# EAGLE board VT_adapter (EAGLE 8.1.1)
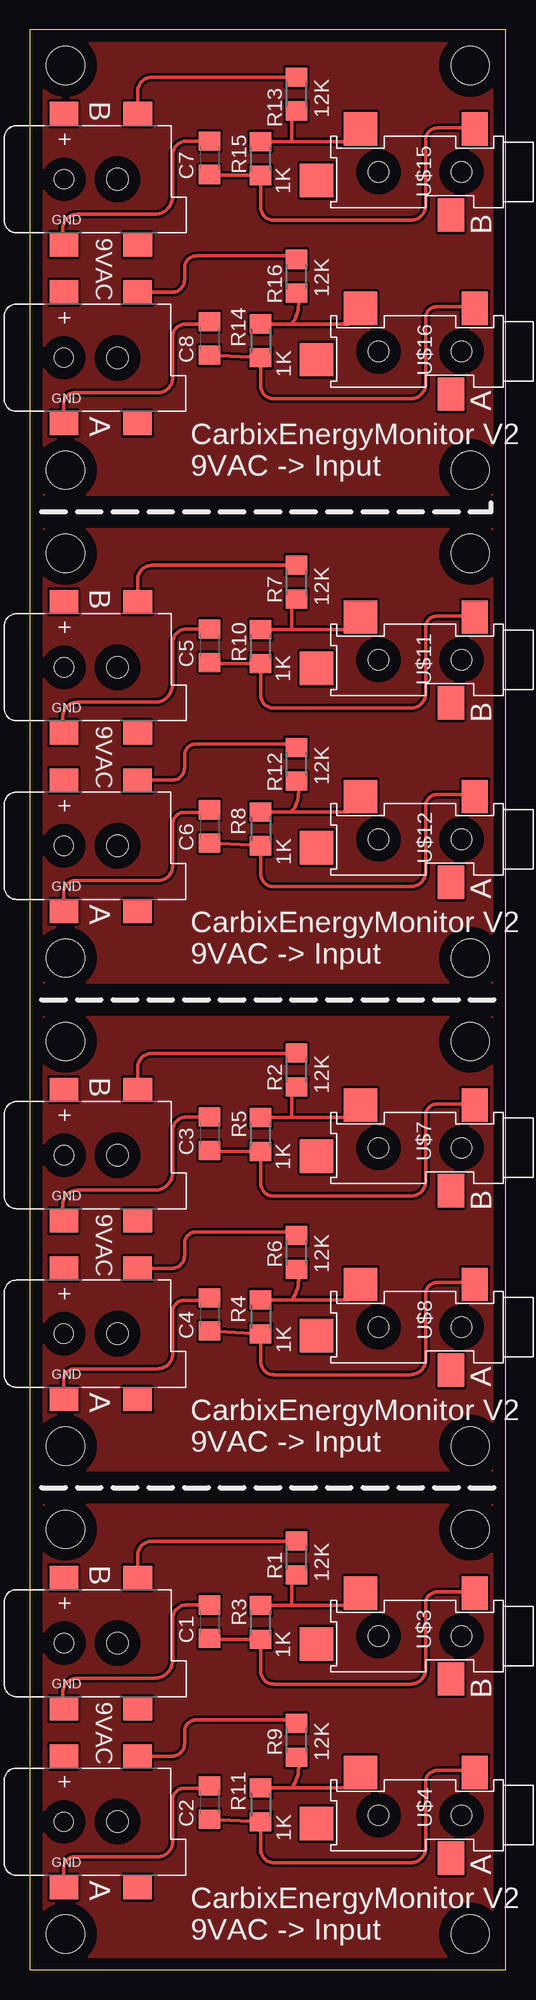
[diagram p0: board, top side]

Size 40 x 163 mm. Coordinates in mm from the lower left corner, seen from the top.
Outline: 0,0 40,0 40,163 0,163 0,0
Copper layers (1*16): Top 0.035mm / dielectric 1.5mm / Bottom 0.035mm
Design rules "default *": minimum track width 10mil, minimum drill 20mil, track to track 8mil, track to pad 8mil, pad to pad 8mil, via to via 8mil, smd to smd 8mil, copper to edge 40mil, drill to drill 8mil, minimum pad ring 10mil, minimum via ring 8mil, stop-mask expansion 3mil, vias tented up to drill 0mil, thermal gap 10mil
Holes 3.2 mm at 37,3 37,37 3,37 3,3 37,44 37,78 3,78 3,44 37,85 37,119 3,119 3,85 37,126 37,160 3,160 3,126

## Footprints (pad centres in the part's own frame; a part is rotated, then mirrored left to right if it is on the bottom)
C1206 = smd 1.6 x 1.8: 1 -1.4,0; 2 1.4,0
R1206 = smd 1.6 x 1.803: 1 -1.422,0; 2 1.422,0
DCJACK_2MM_SMT = smd 2.4 x 2: GND 0,-5.5; GNDBREAK 6.2,-5.5; PWR1 0,5.5; PWR2 6.2,5.5 | hole 1.6: 0,0 | hole 1.8: 4.5,0
STEREO_SMT = smd 2.8 x 2.2: P$1 -3.6,-2.4; P$3 3.6,-4.4 | smd 2.8 x 2.8: P$2 -3.6,-12; P$4 0.7,-15.7 | hole 1.7: 0,-3.5; 0,-10.5

## Placement (x,y rotation side)
C1  10uf  [C1206]  15.1,29.24 270 top
C2  10uf  [C1206]  15.1,14.06 270 top
C3  10uf  [C1206]  15.1,70.24 270 top
C4  10uf  [C1206]  15.1,55.06 270 top
C5  10uf  [C1206]  15.1,111.24 270 top
C6  10uf  [C1206]  15.1,96.06 270 top
C7  10uf  [C1206]  15.1,152.24 270 top
C8  10uf  [C1206]  15.1,137.06 270 top
R1  12K  [R1206]  22.4,34.6 270 top
R2  12K  [R1206]  22.4,75.6 270 top
R3  1K  [R1206]  19.4,29.18 270 top
R4  1K  [R1206]  19.4,54.86 90 top
R5  1K  [R1206]  19.4,70.18 270 top
R6  12K  [R1206]  22.4,60.28 270 top
R7  12K  [R1206]  22.4,116.6 270 top
R8  1K  [R1206]  19.4,95.86 90 top
R9  12K  [R1206]  22.4,19.28 270 top
R10  1K  [R1206]  19.4,111.18 270 top
R11  1K  [R1206]  19.4,13.86 90 top
R12  12K  [R1206]  22.4,101.28 270 top
R13  12K  [R1206]  22.4,157.6 270 top
R14  1K  [R1206]  19.4,136.86 90 top
R15  1K  [R1206]  19.4,152.18 270 top
R16  12K  [R1206]  22.4,142.28 270 top
U$1  2.1MMJACKSMT  [DCJACK_2MM_SMT]  2.87,27.44 0 top
U$2  2.1MMJACKSMT  [DCJACK_2MM_SMT]  2.86,12.44 0 top
U$3  STEREO_SMD  [STEREO_SMT]  39.78,28.05 270 top
U$4  STEREO_SMD  [STEREO_SMT]  39.78,12.98 270 top
U$5  2.1MMJACKSMT  [DCJACK_2MM_SMT]  2.87,68.44 0 top
U$6  2.1MMJACKSMT  [DCJACK_2MM_SMT]  2.86,53.44 0 top
U$7  STEREO_SMD  [STEREO_SMT]  39.78,69.05 270 top
U$8  STEREO_SMD  [STEREO_SMT]  39.78,53.98 270 top
U$9  2.1MMJACKSMT  [DCJACK_2MM_SMT]  2.87,109.44 0 top
U$10  2.1MMJACKSMT  [DCJACK_2MM_SMT]  2.86,94.44 0 top
U$11  STEREO_SMD  [STEREO_SMT]  39.78,110.05 270 top
U$12  STEREO_SMD  [STEREO_SMT]  39.78,94.98 270 top
U$13  2.1MMJACKSMT  [DCJACK_2MM_SMT]  2.87,150.44 0 top
U$14  2.1MMJACKSMT  [DCJACK_2MM_SMT]  2.86,135.44 0 top
U$15  STEREO_SMD  [STEREO_SMT]  39.78,151.05 270 top
U$16  STEREO_SMD  [STEREO_SMT]  39.78,135.98 270 top

## Library data of the parts
C1-C8 = adafruit
R1-R16 = resistor
U$1-U$16 = CarbixEnergyMonitor_parts

## Nets
N$1: C1.2 R3.2 U$3.P$1
N$2: R1.2 R3.1 U$3.P$2
N$3: C1.1 U$1.GND
N$4: C2.1 U$2.GND
N$5: R4.2 R6.2 U$8.P$2
N$6: R1.1 U$1.PWR2
N$7: R9.1 U$2.PWR2
N$8: C4.2 R4.1 U$8.P$1
N$9: C3.2 R5.2 U$7.P$1
N$10: C3.1 U$5.GND
N$11: R9.2 R11.2 U$4.P$2
N$12: C2.2 R11.1 U$4.P$1
N$13: R2.1 U$5.PWR2
N$14: C4.1 U$6.GND
N$15: R6.1 U$6.PWR2
N$16: R2.2 R5.1 U$7.P$2
N$17: R8.2 R12.2 U$12.P$2
N$18: C6.2 R8.1 U$12.P$1
N$19: C5.2 R10.2 U$11.P$1
N$20: C5.1 U$9.GND
N$21: R7.1 U$9.PWR2
N$22: C6.1 U$10.GND
N$23: R12.1 U$10.PWR2
N$24: R7.2 R10.1 U$11.P$2
N$25: R14.2 R16.2 U$16.P$2
N$26: C8.2 R14.1 U$16.P$1
N$27: C7.2 R15.2 U$15.P$1
N$28: C7.1 U$13.GND
N$29: R13.1 U$13.PWR2
N$30: C8.1 U$14.GND
N$31: R16.1 U$14.PWR2
N$32: R13.2 R15.1 U$15.P$2

## Tracks (layer width: path | path; a pad name or v marks a point on that pad's centre or on a via)
GND
  pour Top: 1,39 39,39 39,1 1,1
GND1
  pour Top: 1,80 39,80 39,42 1,42
GND2
  pour Top: 1,121 39,121 39,83 1,83
GND3
  pour Top: 1,162 39,162 39,124 1,124
N$1
  Top 0.305: 36.65,31.65 U$3.P$1 arc90 37.28,31.75 34.25,31.75 arc90 33.25,30.75 33.25,25.25 arc-90 32,24 20.5,24 arc-90 19.4,25.1 R3.2 15.18,27.76 C1.2
N$2
  Top 0.305: 19.82,30.6 R3.1 | 19.55,30.75 arc90 R3.1 | R3.1 22,30.6 | 22,30.6 26.73,30.6 U$3.P$2 | 22,30.6 22,32.78 R1.2
N$3
  Top 0.305: U$1.GND arc-90 2.75,22.06 2.75,23.25 arc-90 4,24.5 10.5,24.5 arc90 12,26 12,29.5 arc-90 13.14,30.64 C1.1
N$4
  Top 0.305: 2.86,7.86 U$2.GND 2.86,8.61 arc-90 3.75,9.5 10.75,9.5 arc90 12,10.75 12,14.25 arc-90 13,15.25 14.89,15.25 arc90 C2.1
N$5
  Top 0.305: R4.2 22,56.28 | 22,56.28 26.78,56.28 27,56.5 27,56.8 U$8.P$2 | 22,56.28 arc60 R6.2
N$6
  Top 0.305: U$1.PWR2 9.07,34.82 arc-90 10.25,36 22.38,36 arc90 R1.1
N$7
  Top 0.305: U$2.PWR2 11.94,17.94 arc90 13,19 13,20 arc-90 14,21 22.1,21 arc-90 R9.1
N$8
  Top 0.305: C4.2 R4.1 19.4,51.1 arc90 20.5,50 32,50 arc90 33.25,51.25 33.25,56.75 arc-90 34.25,57.75 37.21,57.75 arc-90 U$8.P$1
N$9
  Top 0.305: 36.65,72.65 U$7.P$1 arc90 37.28,72.75 34.25,72.75 arc90 33.25,71.75 33.25,66.25 arc-90 32,65 20.5,65 arc-90 19.4,66.1 R5.2 15.18,68.76 C3.2
N$10
  Top 0.305: U$5.GND arc-90 2.75,63.06 2.75,64.25 arc-90 4,65.5 10.5,65.5 arc90 12,67 12,70.5 arc-90 13.14,71.64 C3.1
N$11
  Top 0.305: R11.2 22,15.28 | 22,15.28 26.78,15.28 27,15.5 27,15.8 U$4.P$2 | 22,15.28 arc60 R9.2
N$12
  Top 0.305: C2.2 R11.1 19.4,10.1 arc90 20.5,9 32,9 arc90 33.25,10.25 33.25,15.75 arc-90 34.25,16.75 37.21,16.75 arc-90 U$4.P$1
N$13
  Top 0.305: U$5.PWR2 9.07,75.82 arc-90 10.25,77 22.38,77 arc90 R2.1
N$14
  Top 0.305: 2.86,48.86 U$6.GND 2.86,49.61 arc-90 3.75,50.5 10.75,50.5 arc90 12,51.75 12,55.25 arc-90 13,56.25 14.89,56.25 arc90 C4.1
N$15
  Top 0.305: U$6.PWR2 11.94,58.94 arc90 13,60 13,61 arc-90 14,62 22.1,62 arc-90 R6.1
N$16
  Top 0.305: 19.82,71.6 R5.1 | 19.55,71.75 arc90 R5.1 | R5.1 22,71.6 | 22,71.6 26.73,71.6 U$7.P$2 | 22,71.6 22,73.78 R2.2
N$17
  Top 0.305: R8.2 22,97.28 | 22,97.28 26.78,97.28 27,97.5 27,97.8 U$12.P$2 | 22,97.28 arc60 R12.2
N$18
  Top 0.305: C6.2 R8.1 19.4,92.1 arc90 20.5,91 32,91 arc90 33.25,92.25 33.25,97.75 arc-90 34.25,98.75 37.21,98.75 arc-90 U$12.P$1
N$19
  Top 0.305: 36.65,113.65 U$11.P$1 arc90 37.28,113.75 34.25,113.75 arc90 33.25,112.75 33.25,107.25 arc-90 32,106 20.5,106 arc-90 19.4,107.1 R10.2 15.18,109.76 C5.2
N$20
  Top 0.305: U$9.GND arc-90 2.75,104.06 2.75,105.25 arc-90 4,106.5 10.5,106.5 arc90 12,108 12,111.5 arc-90 13.14,112.64 C5.1
N$21
  Top 0.305: U$9.PWR2 9.07,116.82 arc-90 10.25,118 22.38,118 arc90 R7.1
N$22
  Top 0.305: 2.86,89.86 U$10.GND 2.86,90.61 arc-90 3.75,91.5 10.75,91.5 arc90 12,92.75 12,96.25 arc-90 13,97.25 14.89,97.25 arc90 C6.1
N$23
  Top 0.305: U$10.PWR2 11.94,99.94 arc90 13,101 13,102 arc-90 14,103 22.1,103 arc-90 R12.1
N$24
  Top 0.305: 19.82,112.6 R10.1 | 19.55,112.75 arc90 R10.1 | R10.1 22,112.6 | 22,112.6 26.73,112.6 U$11.P$2 | 22,112.6 22,114.78 R7.2
N$25
  Top 0.305: R14.2 22,138.28 | 22,138.28 26.78,138.28 27,138.5 27,138.8 U$16.P$2 | 22,138.28 arc60 R16.2
N$26
  Top 0.305: C8.2 R14.1 19.4,133.1 arc90 20.5,132 32,132 arc90 33.25,133.25 33.25,138.75 arc-90 34.25,139.75 37.21,139.75 arc-90 U$16.P$1
N$27
  Top 0.305: 36.65,154.65 U$15.P$1 arc90 37.28,154.75 34.25,154.75 arc90 33.25,153.75 33.25,148.25 arc-90 32,147 20.5,147 arc-90 19.4,148.1 R15.2 15.18,150.76 C7.2
N$28
  Top 0.305: U$13.GND arc-90 2.75,145.06 2.75,146.25 arc-90 4,147.5 10.5,147.5 arc90 12,149 12,152.5 arc-90 13.14,153.64 C7.1
N$29
  Top 0.305: U$13.PWR2 9.07,157.82 arc-90 10.25,159 22.38,159 arc90 R13.1
N$30
  Top 0.305: 2.86,130.86 U$14.GND 2.86,131.61 arc-90 3.75,132.5 10.75,132.5 arc90 12,133.75 12,137.25 arc-90 13,138.25 14.89,138.25 arc90 C8.1
N$31
  Top 0.305: U$14.PWR2 11.94,140.94 arc90 13,142 13,143 arc-90 14,144 22.1,144 arc-90 R16.1
N$32
  Top 0.305: 19.82,153.6 R15.1 | 19.55,153.75 arc90 R15.1 | R15.1 22,153.6 | 22,153.6 26.73,153.6 U$15.P$2 | 22,153.6 22,155.78 R13.2

## Text on the board
_tsilk: B | B | 9VAC | A | A | CarbixEnergyMonitor V2 / 9VAC -> Input | B | B | 9VAC | A | A | CarbixEnergyMonitor V2 / 9VAC -> Input | B | B | 9VAC | A | A | CarbixEnergyMonitor V2 / 9VAC -> Input | B | B | 9VAC | A | A | CarbixEnergyMonitor V2 / 9VAC -> Input